# EAGLE board CT_schematic (EAGLE 7.6.0)

Size 100 x 80 mm. Coordinates in mm from the lower left corner, seen from the top.
Outline: 0,0 100,0 100,80 0,80 0,0
Copper layers (1*16): Top 0.035mm / dielectric 1.5mm / Bottom 0.035mm
Design rules "default": minimum track width 10mil, minimum drill 24mil, track to track 8mil, track to pad 8mil, pad to pad 8mil, via to via 8mil, smd to smd 8mil, copper to edge 40mil, drill to drill 8mil, minimum pad ring 10mil, minimum via ring 8mil, stop-mask expansion 4mil, vias tented up to drill 0mil, thermal gap 10mil

## Footprints (pad centres in the part's own frame; a part is rotated, then mirrored left to right if it is on the bottom)
C0603 = smd 0.8 x 0.8: 1 -0.762,0; 2 0.762,0
C0402 = smd 0.5 x 0.5: 1 -0.508,0; 2 0.508,0
EXV-9B = smd 2.718 x 1.778: 1 -2.108,0; 2 2.108,0
R0603 = smd 0.8 x 0.8: 1 -0.762,0; 2 0.762,0
C1210 = smd 1.2 x 2.5: 1 -1.524,0; 2 1.524,0
EXV-9H = smd 3.505 x 1.676: 1 -2.857,0; 2 2.857,0
L0603 = smd 0.8 x 0.8: 1 -0.762,0; 2 0.762,0
IND25X25CZ = smd 2.489 x 3.429: 1 -2.718,0; 2 2.718,0
PJ-037B_PACKAGE = drill 3.7 square: 1 12,0 | drill 3.2 square: 2 6,0
LQFP100 = smd 0.3 x 1.2: 1 -6,-7.75; 2 -5.5,-7.75; 3 -5,-7.75; 4 -4.5,-7.75; 5 -4,-7.75; 6 -3.5,-7.75; 7 -3,-7.75; 8 -2.5,-7.75; 9 -2,-7.75; 10 -1.5,-7.75; 11 -1,-7.75; 12 -0.5,-7.75; 13 0,-7.75; 14 0.5,-7.75; 15 1,-7.75; 16 1.5,-7.75; 17 2,-7.75; 18 2.5,-7.75; 19 3,-7.75; 20 3.5,-7.75; 21 4,-7.75; 22 4.5,-7.75; 23 5,-7.75; 24 5.5,-7.75; 25 6,-7.75; 51 6,7.75; 52 5.5,7.75; 53 5,7.75; 54 4.5,7.75; 55 4,7.75; 56 3.5,7.75; 57 3,7.75; 58 2.5,7.75; 59 2,7.75; 60 1.5,7.75; 61 1,7.75; 62 0.5,7.75; 63 0,7.75; 64 -0.5,7.75; 65 -1,7.75; 66 -1.5,7.75; 67 -2,7.75; 68 -2.5,7.75; 69 -3,7.75; 70 -3.5,7.75; 71 -4,7.75; 72 -4.5,7.75; 73 -5,7.75; 74 -5.5,7.75; 75 -6,7.75 | smd 1.2 x 0.3: 26 7.75,-6; 27 7.75,-5.5; 28 7.75,-5; 29 7.75,-4.5; 30 7.75,-4; 31 7.75,-3.5; 32 7.75,-3; 33 7.75,-2.5; 34 7.75,-2; 35 7.75,-1.5; 36 7.75,-1; 37 7.75,-0.5; 38 7.75,0; 39 7.75,0.5; 40 7.75,1; 41 7.75,1.5; 42 7.75,2; 43 7.75,2.5; 44 7.75,3; 45 7.75,3.5; 46 7.75,4; 47 7.75,4.5; 48 7.75,5; 49 7.75,5.5; 50 7.75,6; 76 -7.75,6; 77 -7.75,5.5; 78 -7.75,5; 79 -7.75,4.5; 80 -7.75,4; 81 -7.75,3.5; 82 -7.75,3; 83 -7.75,2.5; 84 -7.75,2; 85 -7.75,1.5; 86 -7.75,1; 87 -7.75,0.5; 88 -7.75,0; 89 -7.75,-0.5; 90 -7.75,-1; 91 -7.75,-1.5; 92 -7.75,-2; 93 -7.75,-2.5; 94 -7.75,-3; 95 -7.75,-3.5; 96 -7.75,-4; 97 -7.75,-4.5; 98 -7.75,-5; 99 -7.75,-5.5; 100 -7.75,-6
SOT-23-6 = smd 1.1 x 0.6: 1 -1.4,0.95; 2 -1.4,0; 3 -1.4,-0.95; 4 1.4,-0.95; 5 1.4,0; 6 1.4,0.95
SOIC-8 = smd 1.6 x 0.6: 1 -2.7,1.905 | smd 1.55 x 0.6: 2 -2.7,0.635; 3 -2.7,-0.635; 4 -2.7,-1.905; 5 2.7,-1.905; 6 2.7,-0.635; 7 2.7,0.635; 8 2.7,1.905
QFN24_2 = smd 0.6 x 0.2: 1 -1.6,1; 2 -1.6,0.6; 3 -1.6,0.2; 4 -1.6,-0.2; 5 -1.6,-0.6; 6 -1.6,-1; 13 1.6,-1; 14 1.6,-0.6; 15 1.6,-0.2; 16 1.6,0.2; 17 1.6,0.6; 18 1.6,1 | smd 0.2 x 0.6: 7 -1,-1.6; 8 -0.6,-1.6; 9 -0.2,-1.6; 10 0.2,-1.6; 11 0.6,-1.6; 12 1,-1.6; 19 1,1.6; 20 0.6,1.6; 21 0.2,1.6; 22 -0.2,1.6; 23 -0.6,1.6; 24 -1,1.6 | smd 1.75 x 1.59: 25 0,0
WSON-8-PAD = smd 0.45 x 0.7: 1 -0.75,-0.95; 2 0.52,-0.95; 3 1.79,-0.95; 4 3.06,-0.95; 5 3.06,4.35; 6 1.79,4.35; 7 0.52,4.35; 8 -0.75,4.35 | smd 4 x 3.5: PAD 1.15,1.7
RHB32_3P45X3P45 = smd 0.85 x 0.28: 1 -2.475,1.75; 2 -2.475,1.25; 3 -2.475,0.75; 4 -2.475,0.25; 5 -2.475,-0.25; 6 -2.475,-0.75; 7 -2.475,-1.25; 8 -2.475,-1.75; 17 2.475,-1.75; 18 2.475,-1.25; 19 2.475,-0.75; 20 2.475,-0.25; 21 2.475,0.25; 22 2.475,0.75; 23 2.475,1.25; 24 2.475,1.75 | smd 0.28 x 0.85: 9 -1.75,-2.475; 10 -1.25,-2.475; 11 -0.75,-2.475; 12 -0.25,-2.475; 13 0.25,-2.475; 14 0.75,-2.475; 15 1.25,-2.475; 16 1.75,-2.475; 25 1.75,2.475; 26 1.25,2.475; 27 0.75,2.475; 28 0.25,2.475; 29 -0.25,2.475; 30 -0.75,2.475; 31 -1.25,2.475; 32 -1.75,2.475 | smd 3.45 x 3.45: 33 0,0
MICRO_USB_AB = smd 0.4 x 1.35: 1 1.3,0.26; 2 0.65,0.26; 3 0,0.26; 4 -0.65,0.26; 5 -1.3,0.26 | drill 0.6 pad 0.95 long: 6 4.175,-2.54; 7 -4.175,-2.54 | drill 0.7 pad 1.1 long: 8 -2.225,0.46; 9 2.225,0.46
SOT143B = smd 1 x 0.7: 1 -0.75,-1 | smd 0.6 x 0.7: 2 0.95,-1; 3 0.95,1; 4 -0.95,1
USB-A-H = drill 0.914: 1 2.718,3.493; 2 2.718,1.003; 3 2.718,-1.003; 4 2.718,-3.493 | drill 2.311: 5 0,-6.566; 6 0,6.566
ABS07-32.768KHZ-7-T = smd 1.1 x 2.4: 1 -2.5,0; 2 0,0
ABLS-25.000MHZ-B2F-T = smd 5.6 x 2.8: 1 -3.81,0; 2 5.69,0
ASFL1 = smd 1.7 x 1.5: 1 -1.27,-1.1; 2 1.27,-1.1; 3 1.27,1.1; 4 -1.27,1.1
LP2954 = smd 1.6 x 0.6: 1 -2.475,1.905 | smd 1.55 x 0.6: 2 -2.475,0.635; 3 -2.475,-0.635; 4 -2.475,-1.905; 5 2.475,-1.905; 6 2.475,-0.635; 7 2.475,0.635; 8 2.475,1.905
WSON-8 = smd 0.3 x 0.6: 1 -0.75,0; 2 0.05,0; 3 0.85,0; 4 1.65,0; 5 1.65,3.8; 6 0.85,3.8; 7 0.05,3.8; 8 -0.75,3.8 | smd 3 x 2.6: PAD 0.45,1.9
IR3899MTR1PBF = smd 0.25 x 0.75: 1 0,0; 2 0.5,0; 3 1,0; 4 1.5,0; 5 2,0; 6 2.5,0; 7 3,0 | smd 0.75 x 0.25: 8 3.425,0.78; 9 3.425,1.28; 10 3.425,1.78; 14 -0.425,1.78; 15 -0.425,1.28; 16 -0.425,0.78 | smd 0.3 x 1.95: 11 3.22,3.63 | smd 1.62 x 2.42: 12 1.786,3.8 | smd 1 x 1.95: 13 0.117,3.63 | smd 2.19 x 1.25: 17 1.51,1.26
SON-6 = smd 0.55 x 0.3: 1 -0.355,0.5 | smd 0.52 x 0.3: 2 -0.37,0; 3 -0.37,-0.5; 4 0.37,-0.5; 5 0.37,0; 6 0.37,0.5
SW_4-1437565-2 = smd 1.4 x 2.1: 1 -2.23,4.55; 2 -2.23,-4.55; 3 2.23,4.55; 4 2.23,-4.55
LGM67K-G1J2-24-Z = smd 0.8 x 1.4: A -2,0; C 0,0
NC7SZ125M5X = smd 1.3 x 0.7: 1 -1.3,0.95; 2 -1.3,0; 3 -1.3,-0.95; 4 1.3,-0.95; 5 1.3,0.95

## Placement (x,y rotation side)
C1  1e-06  [C0603]  -22.86,73.66 0 top  (outside the outline)
C2  1e-07  [C0603]  -26.67,73.66 0 top  (outside the outline)
C3  1e-07  [C0603]  -30.48,73.66 0 top  (outside the outline)
C4  1e-07  [C0603]  -34.29,73.66 0 top  (outside the outline)
C5  1e-07  [C0603]  -38.1,73.66 0 top  (outside the outline)
C6  1e-07  [C0603]  -41.91,73.66 0 top  (outside the outline)
C7  1e-07  [C0603]  -45.72,73.66 0 top  (outside the outline)
C8  4.7e-06  [C0603]  -69.85,68.58 0 top  (outside the outline)
C9  2.2e-06  [C0603]  -73.66,68.58 0 top  (outside the outline)
C10  2.2e-06  [C0603]  -77.47,68.58 0 top  (outside the outline)
C11  1e-08  [C0603]  -49.53,73.66 0 top  (outside the outline)
C12  1e-06  [C0603]  -53.34,73.66 0 top  (outside the outline)
C13  1e-11  [C0402]  -41.91,78.74 0 top  (outside the outline)
C14  1e-11  [C0402]  -45.72,78.74 0 top  (outside the outline)
C15  1e-11  [C0402]  -49.53,78.74 0 top  (outside the outline)
C16  1e-11  [C0402]  -53.34,78.74 0 top  (outside the outline)
C17  1e-08  [C0402]  -57.15,78.74 0 top  (outside the outline)
C18  1e-07  [C0402]  -60.96,78.74 0 top  (outside the outline)
C19  1e-07  [C0402]  -64.77,78.74 0 top  (outside the outline)
C20  1e-08  [C0402]  -68.58,78.74 0 top  (outside the outline)
C21  1e-06  [C0603]  -57.15,73.66 0 top  (outside the outline)
C22  1e-07  [C0402]  -72.39,78.74 0 top  (outside the outline)
C23  2.2e-06  [C0603]  -81.28,68.58 0 top  (outside the outline)
C24  1e-07  [C0402]  -76.2,78.74 0 top  (outside the outline)
C25  1e-07  [C0402]  -80.01,78.74 0 top  (outside the outline)
C26  2.2e-06  [C0603]  -15.24,73.66 0 top  (outside the outline)
C27  1e-06  [C0603]  -60.96,73.66 0 top  (outside the outline)
C28  1e-08  [C0402]  -15.24,83.82 0 top  (outside the outline)
C29  1e-06  [EXV-9B]  -43.18,50.8 0 top  (outside the outline)
C30  2.2e-06  [EXV-9B]  -52.07,50.8 0 top  (outside the outline)
C31  8e-07  [R0603]  -64.77,73.66 0 top  (outside the outline)
C32  1e-05  [C1210]  -29.21,52.07 0 top  (outside the outline)
C33  0.0001  [C1210]  -35.56,52.07 0 top  (outside the outline)
C34  2.2e-06  [C0603]  -19.05,73.66 0 top  (outside the outline)
C35  1e-07  [C0402]  -19.05,83.82 0 top  (outside the outline)
C36  1e-07  [C0402]  -22.86,83.82 0 top  (outside the outline)
C37  8.7488758840791e-09  [R0603]  -31.75,58.42 0 top  (outside the outline)
C38  2.9825713241179e-07  [R0603]  -41.91,58.42 0 top  (outside the outline)
C41  1e-07  [C0402]  -26.67,83.82 0 top  (outside the outline)
C42  0.0001  [EXV-9H]  -71.12,34.29 0 top  (outside the outline)
C43  0.0001  [EXV-9H]  -17.78,44.45 0 top  (outside the outline)
C44  1e-08  [C0402]  -30.48,83.82 0 top  (outside the outline)
C45  1e-08  [C0402]  -34.29,83.82 0 top  (outside the outline)
C46  1e-08  [C0402]  -38.1,83.82 0 top  (outside the outline)
F1  240.0  [L0603]  -68.58,73.66 0 top  (outside the outline)
I1  6.8e-07  [IND25X25CZ]  -48.26,44.45 0 top  (outside the outline)
J1  PJ-037B  [PJ-037B_PACKAGE]  -64.77,7.62 0 top  (outside the outline)
R2  1000.0  [R0603]  -72.39,73.66 0 top  (outside the outline)
R4  4700.0  [R0603]  -76.2,73.66 0 top  (outside the outline)
R5  4700.0  [R0603]  -80.01,73.66 0 top  (outside the outline)
R6  4700.0  [R0603]  -15.24,78.74 0 top  (outside the outline)
R7  2200.0  [R0603]  -19.05,78.74 0 top  (outside the outline)
R8  2200.0  [R0603]  -22.86,78.74 0 top  (outside the outline)
R9  47000.0  [R0603]  -40.64,63.5 0 top  (outside the outline)
R10  10000.0  [R0603]  -45.72,63.5 0 top  (outside the outline)
R11  1270.0  [R0603]  -26.67,78.74 0 top  (outside the outline)
R12  10000.0  [R0603]  -50.8,63.5 0 top  (outside the outline)
R13  10000.0  [R0603]  -55.88,63.5 0 top  (outside the outline)
R14  10000.0  [R0603]  -60.96,63.5 0 top  (outside the outline)
R15  10000.0  [R0603]  -66.04,63.5 0 top  (outside the outline)
R16  10000.0  [R0603]  -71.12,63.5 0 top  (outside the outline)
R17  10000.0  [R0603]  -76.2,63.5 0 top  (outside the outline)
R18  10000.0  [R0603]  -81.28,63.5 0 top  (outside the outline)
R19  10000.0  [R0603]  -15.24,68.58 0 top  (outside the outline)
R20  10000.0  [R0603]  -20.32,68.58 0 top  (outside the outline)
R21  47000.0  [R0603]  -25.4,68.58 0 top  (outside the outline)
R22  10000.0  [R0603]  -30.48,68.58 0 top  (outside the outline)
R23  10000.0  [R0603]  -35.56,68.58 0 top  (outside the outline)
R24  100000.0  [R0603]  -74.93,58.42 0 top  (outside the outline)
R25  100000.0  [R0603]  -80.01,58.42 0 top  (outside the outline)
R26  47000.0  [R0603]  -40.64,68.58 0 top  (outside the outline)
R27  100000.0  [R0603]  -15.24,63.5 0 top  (outside the outline)
R28  100000.0  [R0603]  -20.32,63.5 0 top  (outside the outline)
R29  153694.38  [R0603]  -69.85,58.42 0 top  (outside the outline)
R30  100000.0  [R0603]  -25.4,63.5 0 top  (outside the outline)
R31  0.1  [R0603]  -30.48,78.74 0 top  (outside the outline)
R32  4030.2416170974  [R0603]  -49.53,58.42 0 top  (outside the outline)
R33  453.0  [R0603]  -34.29,78.74 0 top  (outside the outline)
R34  58.26650887574  [R0603]  -64.77,58.42 0 top  (outside the outline)
R35  130.0  [R0603]  -38.1,78.74 0 top  (outside the outline)
R36  39000.0  [R0603]  -45.72,68.58 0 top  (outside the outline)
R37  49900.0  [R0603]  -50.8,68.58 0 top  (outside the outline)
R38  5113.9346405229  [R0603]  -57.15,58.42 0 top  (outside the outline)
R39  10000.0  [R0603]  -55.88,68.58 0 top  (outside the outline)
R40  10000.0  [R0603]  -60.96,68.58 0 top  (outside the outline)
R41  82000.0  [R0603]  -66.04,68.58 0 top  (outside the outline)
R42  300000.0  [R0603]  -30.48,63.5 0 top  (outside the outline)
R43  120000.0  [R0603]  -35.56,63.5 0 top  (outside the outline)
U1  STM32F446VCT6  [LQFP100]  -24.13,8.89 0 top  (outside the outline)
U2  MAX4995AAUT+T  [SOT-23-6]  -59.69,50.8 0 top  (outside the outline)
U3  AT25128B-SSHL-T  [SOIC-8]  -24.13,35.56 0 top  (outside the outline)
U4  MPU-9250  [QFN24_2]  -21.59,58.42 0 top  (outside the outline)
U5  MX25R6435FZAIH0  [WSON-8-PAD]  -46.99,21.59 0 top  (outside the outline)
U6  TUSB1210BRHBR  [RHB32_3P45X3P45]  -55.88,44.45 0 top  (outside the outline)
U7  47590-0001  [MICRO_USB_AB]  -73.66,7.62 0 top  (outside the outline)
U8  prtr5v0u2ax  [SOT143B]  -50.8,83.82 0 top  (outside the outline)
U9  MAX4995AAUT+T  [SOT-23-6]  -64.77,50.8 0 top  (outside the outline)
U10  61400416021  [USB-A-H]  -39.37,8.89 0 top  (outside the outline)
U11  prtr5v0u2ax  [SOT143B]  -63.5,83.82 0 top  (outside the outline)
U12  ABS07-32.768KHZ-7-T  [ABS07-32.768KHZ-7-T]  -76.2,44.45 0 top  (outside the outline)
U13  ABLS-25.000MHZ-B2F-T  [ABLS-25.000MHZ-B2F-T]  -36.83,44.45 0 top  (outside the outline)
U14  ASFL1-19.2MHZ-NCS  [ASFL1]  -62.23,34.29 0 top  (outside the outline)
U15  LP2954AIMX/NOPB  [LP2954]  -77.47,22.86 0 top  (outside the outline)
U16  LP2951ACSDX/NOPB  [WSON-8]  -44.45,33.02 0 top  (outside the outline)
U17  IR3899MTR1PBF  [IR3899MTR1PBF]  -62.23,20.32 0 top  (outside the outline)
U18  TPS3895ADRYR  [SON-6]  -67.31,82.55 0 top  (outside the outline)
U19  4-1437565-2  [SW_4-1437565-2]  -27.94,24.13 0 top  (outside the outline)
U20  Q65110A2395  [LGM67K-G1J2-24-Z]  -17.78,52.07 0 top  (outside the outline)
U21  nc7sz125m5x  [NC7SZ125M5X]  -69.85,50.8 0 top  (outside the outline)
U22  nc7sz125m5x  [NC7SZ125M5X]  -76.2,50.8 0 top  (outside the outline)
U23  nc7sz125m5x  [NC7SZ125M5X]  -15.24,57.15 0 top  (outside the outline)

## Library data of the parts
C1-C38 C41-C46 F1 I1 J1 R2 R4-R43 U1-U23 = circuit_tree

## Nets
CLK_CRYSTAL_U1_8: C13.1 U1.8 U12.1
CLK_CRYSTAL_U1_9: C14.1 U1.9 U12.2
CLK_CRYSTAL_U1_12: C15.1 U1.12 U13.1
CLK_CRYSTAL_U1_13: C16.1 U1.13 U13.2
CLK_U6_1: U6.1 U14.3
GND: C1.2 C2.2 C3.2 C4.2 C5.2 C6.2 C7.2 C8.2 C9.2 C10.2 C11.2 C12.2 C13.2 C14.2 C15.2 C16.2 C17.2 C18.2 C19.2 C20.2 C21.2 C22.2 C23.2 C24.2 C25.2 C26.2 C27.2 C28.2 C29.2 C30.2 C31.2 C32.2 C34.2 C35.2 C36.2 C41.2 C42.2 C43.2 C44.2 C45.2 C46.2 J1.2 R2.2 R9.2 R10.2 R11.2 R13.2 R21.2 R23.2 R27.2 R30.2 R31.1 R31.2 R33.2 R36.2 R38.2 R41.2 R43.2 U1.10 U1.20 U1.27 U1.49 U1.74 U1.99 U2.2 U3.4 U4.18 U4.20 U4.25 U5.4 U5.PAD U6.33 U7.5 U7.6 U7.7 U7.8 U7.9 U8.1 U9.2 U10.4 U10.5 U10.6 U11.1 U14.2 U15.4 U16.3 U16.4 U16.PAD U17.4 U17.11 U17.17 U18.2 U20.C U21.1 U21.3 U22.1 U22.3 U23.1 U23.3
NET_U1_14: R5.1 U1.14 U22.4
NET_U1_22: C11.1 C12.1 F1.1 U1.21 U1.22
NET_U1_48: C9.1 U1.48
NET_U1_69: R11.1 U1.69
NET_U1_73: C10.1 U1.73
NET_U1_93: R8.1 U1.93 U4.24
NET_U1_94: R10.1 U1.94
NET_U1_95: R7.1 U1.95 U4.23
NET_U1_97: U20.A
NET_U1_98: U19.3 U19.4
NET_U2_3: R9.1 U2.3
NET_U3_3: R14.1 U3.3
NET_U3_7: R16.1 U3.7
NET_U4_9: R18.1 U4.9
NET_U4_10: C18.1 U4.10
NET_U4_22: R17.1 U4.22
NET_U5_7: R4.1 U1.24 U5.7 U21.4
NET_U6_11: R22.1 U6.11
NET_U6_12: C26.1 U6.12
NET_U6_14: R23.1 U6.14
NET_U6_20: C23.1 U6.20
NET_U6_27: R6.1 U6.27 U23.4
NET_U7_1: C27.1 U6.22 U7.1 U8.4 U9.1
NET_U7_2: U6.19 U7.2 U8.3
NET_U7_3: U6.18 U7.3 U8.2
NET_U7_4: U6.23 U7.4
NET_U9_3: R21.1 U9.3
NET_U9_4: U6.17 U9.4
NET_U15_3: R25.1 U15.3
NET_U15_5: R24.1 U15.5
NET_U15_7: R26.2 R27.1 U15.7
NET_U16_5: R28.1 U16.5
NET_U16_7: R29.2 R30.1 U16.7
NET_U17_1: C37.1 R32.1 R33.1 R34.1 R35.1 U17.1 U17.8
NET_U17_2: C36.1 U17.2
NET_U17_3: C37.2 C38.1 C38.2 U17.3
NET_U17_5: R36.1 U17.5
NET_U17_10: C34.1 U17.10
NET_U17_12: C33.1 I1.1 U17.12
NET_U17_13: U17.13
NET_U17_14: C33.2 U17.14
NET_U17_15: R37.1 R38.1 U17.15
NET_U17_ATNET_3: I1.2 R32.2
NET_U17_ATNET_4: C38.2 R34.2
NET_U17_ATNET_5: R35.2
NET_U18_1: R40.1 R41.1 U18.1
NET_U18_3: R42.2 R43.1 U18.3
NET_U18_4: R39.1 U18.4 U21.2 U22.2 U23.2
NET_U19_1: R2.1 U19.1 U19.2
PROC_GPIO_TO_U1_USB_FAULT: R12.1 U1.3 U2.6
PROC_GPIO_TO_U1_VBUS_EN: R13.1 U1.2 U2.4
PROC_GPIO_TO_U4_FSYNC: U1.5 U4.11
PROC_GPIO_TO_U4_INT_B: U1.4 U4.12
PROC_QUADSPI_BK1_IO0: U1.58 U5.5
PROC_QUADSPI_BK1_IO1: U1.59 U5.2
PROC_QUADSPI_BK1_IO2: R20.1 U1.1 U5.3
PROC_QUADSPI_BK1_NCS: R19.1 U1.92 U5.1
PROC_QUADSPI_CLK: U1.84 U5.6
PROC_SPI1_MISO: U1.31 U3.2
PROC_SPI1_MOSI: U1.32 U3.5
PROC_SPI1_NSS: R15.1 U1.29 U3.1
PROC_SPI1_SCK: U1.89 U3.6
PROC_USB_OTG_FS_DM: U1.70 U10.2 U11.3
PROC_USB_OTG_FS_DP: U1.71 U10.3 U11.2
PROC_USB_OTG_FS_VBUS: U1.68 U2.1 U10.1 U11.4
PROC_USB_OTG_HS_ULPI_CK: U1.30 U6.26
PROC_USB_OTG_HS_ULPI_D0: U1.26 U6.3
PROC_USB_OTG_HS_ULPI_D1: U1.35 U6.4
PROC_USB_OTG_HS_ULPI_D2: U1.36 U6.5
PROC_USB_OTG_HS_ULPI_D3: U1.47 U6.6
PROC_USB_OTG_HS_ULPI_D4: U1.37 U6.7
PROC_USB_OTG_HS_ULPI_D5: U1.51 U6.9
PROC_USB_OTG_HS_ULPI_D6: U1.52 U6.10
PROC_USB_OTG_HS_ULPI_D7: U1.91 U6.13
PROC_USB_OTG_HS_ULPI_DIR: U1.17 U6.31
PROC_USB_OTG_HS_ULPI_NXT: U1.18 U6.2
PROC_USB_OTG_HS_ULPI_STP: U1.15 U6.29
VCC_S1_16V9: C29.1 C31.1 C35.1 C42.1 C43.1 J1.1 R25.2 R37.2 U15.8 U16.8 U17.9
VCC_TIER1_1V8: C1.1 C2.1 C3.1 C4.1 C5.1 C6.1 C7.1 C8.1 C17.1 C20.1 C21.1 C24.1 C25.1 C30.1 C41.1 C44.1 C45.1 C46.1 F1.2 R4.2 R5.2 R6.2 R7.2 R8.2 R12.2 R14.2 R15.2 R16.2 R17.2 R18.2 R19.2 R20.2 R22.2 R24.2 R26.1 R39.2 R40.2 R42.1 U1.6 U1.11 U1.19 U1.28 U1.50 U1.75 U1.100 U3.8 U4.1 U4.8 U5.8 U6.28 U6.30 U6.32 U15.1 U18.6 U21.5 U22.5 U23.5
VCC_TIER1_3V3: C19.1 C22.1 C28.1 C32.1 R28.2 R29.1 U4.13 U6.21 U14.4 U16.1
VCC_TIER1_5V0: I1.2 R32.2 U2.5 U9.5

## Tracks (layer width: path | path; a pad name or v marks a point on that pad's centre or on a via)
CLK_CRYSTAL_U1_8  (2 unrouted)
CLK_CRYSTAL_U1_9  (2 unrouted)
CLK_CRYSTAL_U1_12  (2 unrouted)
CLK_CRYSTAL_U1_13  (2 unrouted)
CLK_U6_1  (1 unrouted)
GND  (98 unrouted)
NET_U1_14  (2 unrouted)
NET_U1_22  (4 unrouted)
NET_U1_48  (1 unrouted)
NET_U1_69  (1 unrouted)
NET_U1_73  (1 unrouted)
NET_U1_93  (2 unrouted)
NET_U1_94  (1 unrouted)
NET_U1_95  (2 unrouted)
NET_U1_98  (1 unrouted)
NET_U2_3  (1 unrouted)
NET_U3_3  (1 unrouted)
NET_U3_7  (1 unrouted)
NET_U4_9  (1 unrouted)
NET_U4_10  (1 unrouted)
NET_U4_22  (1 unrouted)
NET_U5_7  (3 unrouted)
NET_U6_11  (1 unrouted)
NET_U6_12  (1 unrouted)
NET_U6_14  (1 unrouted)
NET_U6_20  (1 unrouted)
NET_U6_27  (2 unrouted)
NET_U7_1  (4 unrouted)
NET_U7_2  (2 unrouted)
NET_U7_3  (2 unrouted)
NET_U7_4  (1 unrouted)
NET_U9_3  (1 unrouted)
NET_U9_4  (1 unrouted)
NET_U15_3  (1 unrouted)
NET_U15_5  (1 unrouted)
NET_U15_7  (2 unrouted)
NET_U16_5  (1 unrouted)
NET_U16_7  (2 unrouted)
NET_U17_1  (6 unrouted)
NET_U17_2  (1 unrouted)
NET_U17_3  (3 unrouted)
NET_U17_5  (1 unrouted)
NET_U17_10  (1 unrouted)
NET_U17_12  (2 unrouted)
NET_U17_14  (1 unrouted)
NET_U17_15  (2 unrouted)
NET_U17_ATNET_3  (1 unrouted)
NET_U17_ATNET_4  (1 unrouted)
NET_U18_1  (2 unrouted)
NET_U18_3  (2 unrouted)
NET_U18_4  (4 unrouted)
NET_U19_1  (2 unrouted)
PROC_GPIO_TO_U1_USB_FAULT  (2 unrouted)
PROC_GPIO_TO_U1_VBUS_EN  (2 unrouted)
PROC_GPIO_TO_U4_FSYNC  (1 unrouted)
PROC_GPIO_TO_U4_INT_B  (1 unrouted)
PROC_QUADSPI_BK1_IO0  (1 unrouted)
PROC_QUADSPI_BK1_IO1  (1 unrouted)
PROC_QUADSPI_BK1_IO2  (2 unrouted)
PROC_QUADSPI_BK1_NCS  (2 unrouted)
PROC_QUADSPI_CLK  (1 unrouted)
PROC_SPI1_MISO  (1 unrouted)
PROC_SPI1_MOSI  (1 unrouted)
PROC_SPI1_NSS  (2 unrouted)
PROC_SPI1_SCK  (1 unrouted)
PROC_USB_OTG_FS_DM  (2 unrouted)
PROC_USB_OTG_FS_DP  (2 unrouted)
PROC_USB_OTG_FS_VBUS  (3 unrouted)
PROC_USB_OTG_HS_ULPI_CK  (1 unrouted)
PROC_USB_OTG_HS_ULPI_D0  (1 unrouted)
PROC_USB_OTG_HS_ULPI_D1  (1 unrouted)
PROC_USB_OTG_HS_ULPI_D2  (1 unrouted)
PROC_USB_OTG_HS_ULPI_D3  (1 unrouted)
PROC_USB_OTG_HS_ULPI_D4  (1 unrouted)
PROC_USB_OTG_HS_ULPI_D5  (1 unrouted)
PROC_USB_OTG_HS_ULPI_D6  (1 unrouted)
PROC_USB_OTG_HS_ULPI_D7  (1 unrouted)
PROC_USB_OTG_HS_ULPI_DIR  (1 unrouted)
PROC_USB_OTG_HS_ULPI_NXT  (1 unrouted)
PROC_USB_OTG_HS_ULPI_STP  (1 unrouted)
VCC_S1_16V9  (10 unrouted)
VCC_TIER1_1V8  (56 unrouted)
VCC_TIER1_3V3  (9 unrouted)
VCC_TIER1_5V0  (3 unrouted)